# EAGLE board coronakiller (EAGLE 9.6.2)
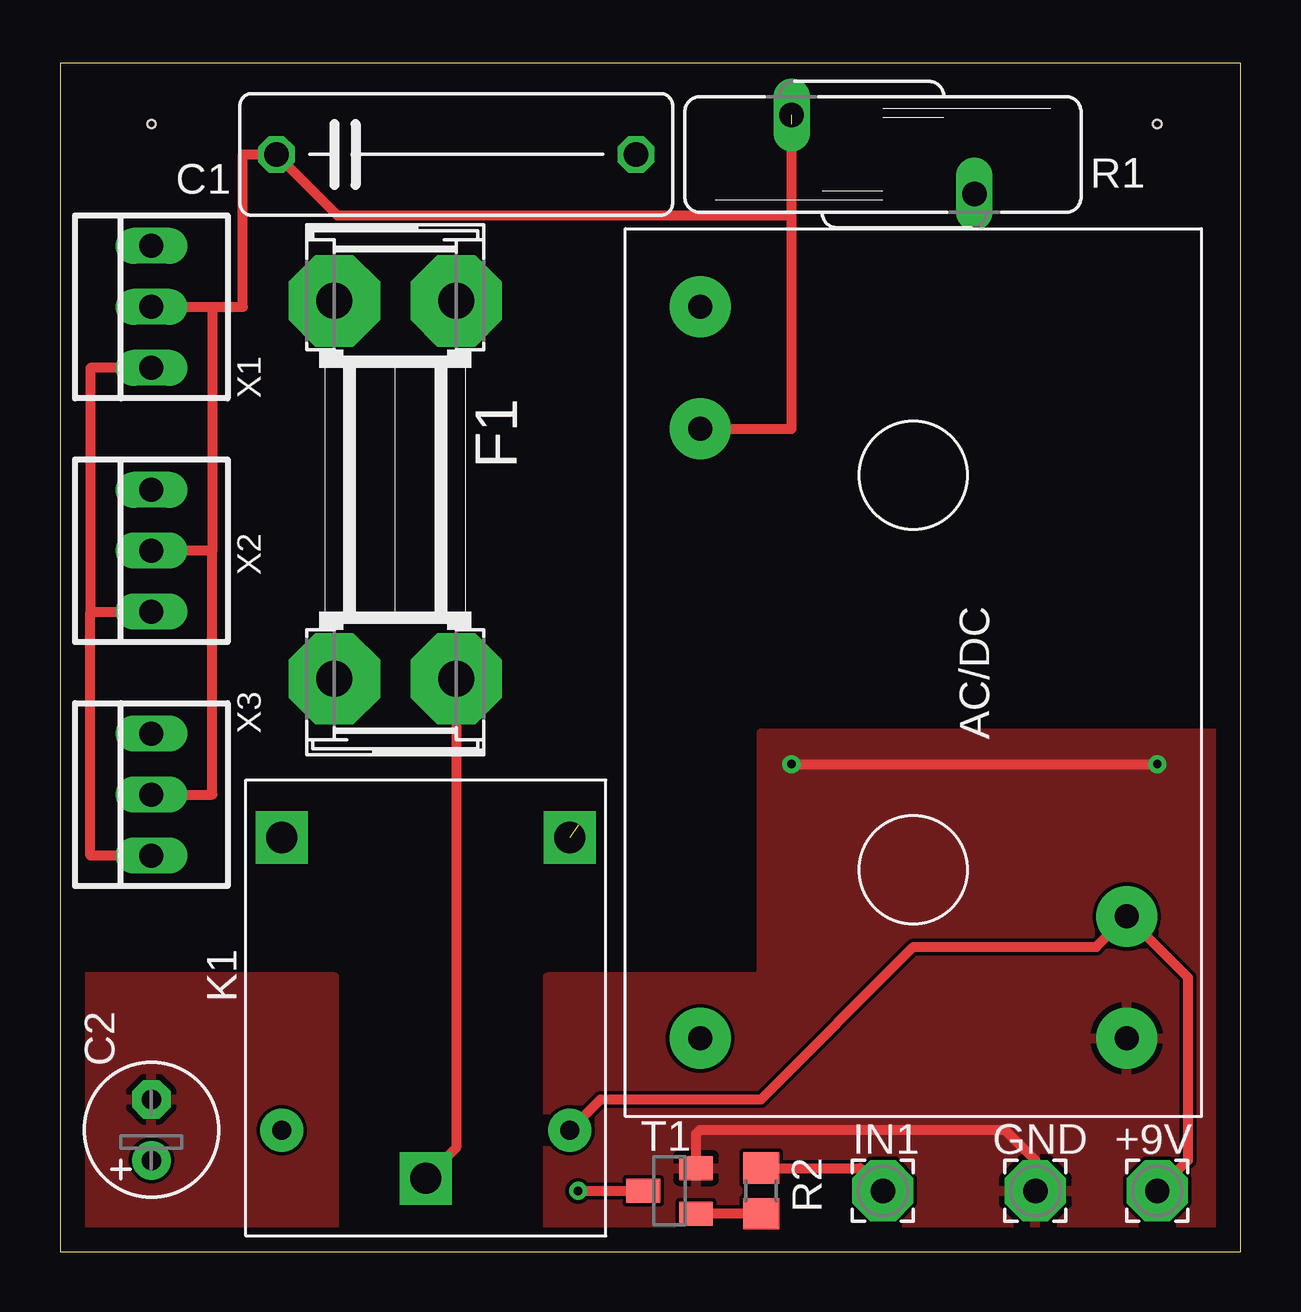
[diagram p0: board, top side]
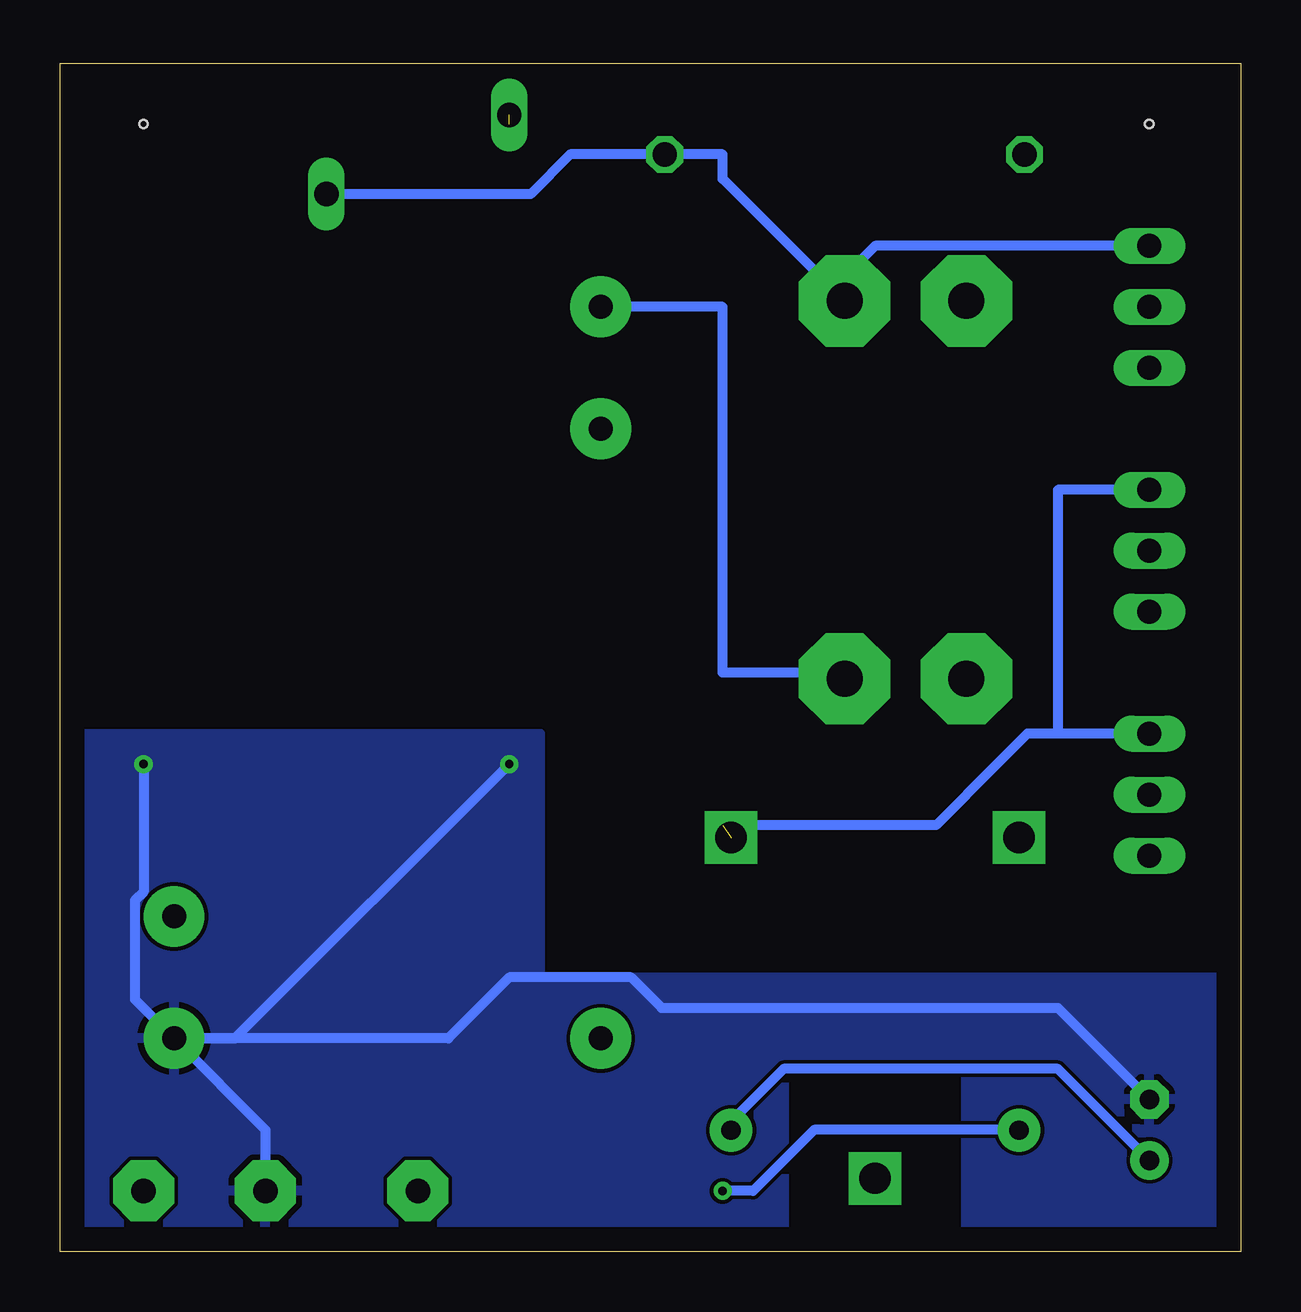
[diagram p1: board, bottom side, seen from below]

Size 49.2 x 49.52 mm. Coordinates in mm from the lower left corner, seen from the top.
Outline: 0,0 49.2,0 49.2,49.52 0,49.52 0,0
Copper layers (1*16): Top 0.035mm / dielectric 1.5mm / Bottom 0.035mm
Design rules "default": minimum track width 6mil, minimum drill 0.35mm, track to track 6mil, track to pad 6mil, pad to pad 6mil, via to via 6mil, smd to smd 6mil, copper to edge 40mil, drill to drill 6mil, minimum pad ring 10mil, minimum via ring 8mil, stop-mask expansion 4mil, vias tented up to drill 0mil, thermal gap 10mil
Holes 0.35 mm at 3.81,46.99 45.72,46.99

## Footprints (pad centres in the part's own frame; a part is rotated, then mirrored left to right if it is on the bottom)
2,54/1,0 = drill 1.016 pad 2.54 octagon: 1 0,0
IRM_03 = drill 1 pad 2.54: AC/L -15.24,-8.89; AC/N -10.16,-8.89; NC 15.24,-8.89; V+ 10.16,8.89; V- 15.24,8.89
C150-054X183 = drill 1.016 octagon: 1 -7.493,0; 2 7.493,0
E2,5-6 = drill 0.813 pad 1.6: + -1.27,0 | drill 0.813 pad 1.6 octagon: - 1.27,0
SHK20Q = drill 1.5 pad 3.81 octagon: 1A -7.874,2.54; 1B -7.874,-2.54; 2A 7.874,2.54; 2B 7.874,-2.54
36.11 = drill 1.3 pad 2.184 square: 11 -7.1,0; 12 7.1,6; 14 7.1,-6 | drill 0.8 pad 1.778: A1 -5.1,-6; A2 -5.1,6
S14K275 = drill 1.016 long: 1 -1.651,-3.81; 2 1.651,3.81
R0805 = smd 1.3 x 1.5: 1 -0.95,0; 2 0.95,0
SOT23 = smd 1 x 1.4: 1 -0.95,-1.1; 2 0.95,-1.1; 3 0,1.1
22-23-2031 = drill 1 long: 1 -2.54,0; 2 0,0; 3 2.54,0

## Placement (x,y rotation side)
+9V  +9V  [2,54/1,0]  45.72,2.54 0 top
AC/DC  AC/DC  [IRM_03]  35.56,24.13 270 top
C1  330n  [C150-054X183]  16.51,45.72 0 top
C2  10µ  [E2,5-6]  3.81,5.08 90 top
F1  1,6A  [SHK20Q]  13.97,31.75 270 top
GND  GND  [2,54/1,0]  40.64,2.54 0 top
IN1  IN1  [2,54/1,0]  34.29,2.54 0 top
K1  36.11  [36.11]  15.24,10.16 90 top
R1  S14K275  [S14K275]  34.29,45.72 90 top
R2  10K  [R0805]  29.21,2.54 90 top
T1  BC846  [SOT23]  25.4,2.54 90 top
X1  22-23-2031  [22-23-2031]  3.81,39.37 90 top
X2  22-23-2031  [22-23-2031]  3.81,29.21 90 top
X3  22-23-2031  [22-23-2031]  3.81,19.05 90 top

## Library data of the parts
+9V GND IN1 = wirepad
AC/DC = meanwell_irm_v6
C1 C2 = rcl; SPICEPREFIX: C
F1 = fuse; OC_FARNELL: unknown; OC_NEWARK: unknown
K1 = relay_finder_36_11
R1 = varistor
R2 = rcl; SPICEPREFIX: R
T1 = transistor-neu-to92
X1-X3 = con-molex; MF: MOLEX; MPN: 22-23-2031; OC_FARNELL: 1462950; OC_NEWARK: 30C0862

## Nets
GND: AC/DC.V- C2.- GND.1 T1.2
N$1: AC/DC.AC/N C1.1 R1.2 X1.2 X2.2 X3.2
N$2: X1.1 X2.1 X3.1
N$3: C1.2 F1.1A R1.1 X1.3
N$4: AC/DC.AC/L F1.2A K1.11
N$5: K1.A2 T1.3
N$6: R2.1 T1.1
N$7: IN1.1 R2.2
N$8: K1.14 X2.3 X3.3
VCC: +9V.1 AC/DC.V+ C2.+ K1.A1

## Tracks (layer width: path | path; a pad name or v marks a point on that pad's centre or on a via)
GND  (via drill 0.35)
  Top 0.406: T1.2 26.5,4.91 26.67,5.08 39.37,5.08 40.64,3.81 GND.1 | v30.48,20.32 v45.72,20.32
  Bottom 0.406: AC/DC.V- 33.02,8.89 30.48,11.43 25.4,11.43 24.13,10.16 7.62,10.16 C2.- | AC/DC.V- 40.64,5.08 GND.1 | AC/DC.V- 41.91,8.89 v30.48,20.32 | AC/DC.V- 46.08,10.52 46.08,14.64 45.72,15 v45.72,20.32
  pour Bottom: 0,10.16 0,0 11.43,0 11.43,7.62 19.05,7.62 19.05,0 49.53,0 49.53,21.59 29.21,21.59 29.21,11.43 0,11.43
  pour Top: 0,11.43 0,0 11.43,0 11.43,11.43
  pour Top: 20.32,11.43 20.32,0 49.53,0 49.53,21.59 29.21,21.59 29.21,11.43
N$1  (1 unrouted)
  Top 0.406: X1.2 6.35,39.37 | 6.35,39.37 6.35,29.21 | 6.35,29.21 X2.2 | X3.2 6.35,19.05 6.35,29.21 | 6.35,39.37 7.62,39.37 7.62,45.72 C1.1 11.56,43.18 30.48,43.18 | 30.48,43.18 30.48,46.99 | AC/DC.AC/N 30.48,34.29 30.48,43.18
N$2
  Top 0.406: X1.1 1.27,36.83 1.27,26.67 | 1.27,26.67 X2.1 | X3.1 1.27,16.51 1.27,26.67
N$3
  Bottom 0.406: X1.3 15.24,41.91 16.51,40.64 F1.1A 21.59,44.7 21.59,45.72 C1.2 27.94,45.72 29.59,44.07 R1.1 38.1,44.45
N$4
  Top 0.406: F1.2A 16.51,4.33 K1.11
  Bottom 0.406: F1.2A 16.76,24.13 21.59,24.13 21.59,39.37 AC/DC.AC/L
N$5  (via drill 0.35)
  Top 0.406: T1.3 24.21,2.46 24.13,2.54 v21.59,2.54
  Bottom 0.406: K1.A2 9.26,5.08 17.78,5.08 20.32,2.54 v21.59,2.54
N$6
  Top 0.406: R2.1 T1.1
N$7
  Top 0.406: R2.2 33.34,3.49 IN1.1
N$8  (1 unrouted)
  Bottom 0.406: X2.3 7.62,31.75 7.62,21.59 | X3.3 7.62,21.59 | 7.62,21.59 8.89,21.59 10.16,20.32 12.7,17.78 21.59,17.78
VCC
  Top 0.406: AC/DC.V+ 45.72,12.7 | K1.A1 22.53,6.35 29.21,6.35 35.56,12.7 43.18,12.7 AC/DC.V+ | AC/DC.V+ 46.99,11.43 46.99,3.81 +9V.1
  Bottom 0.406: K1.A1 21.43,5.25 19.05,7.62 7.62,7.62 C2.+